# EAGLE board USB Multiplicator 2025 (EAGLE 9.6.2)
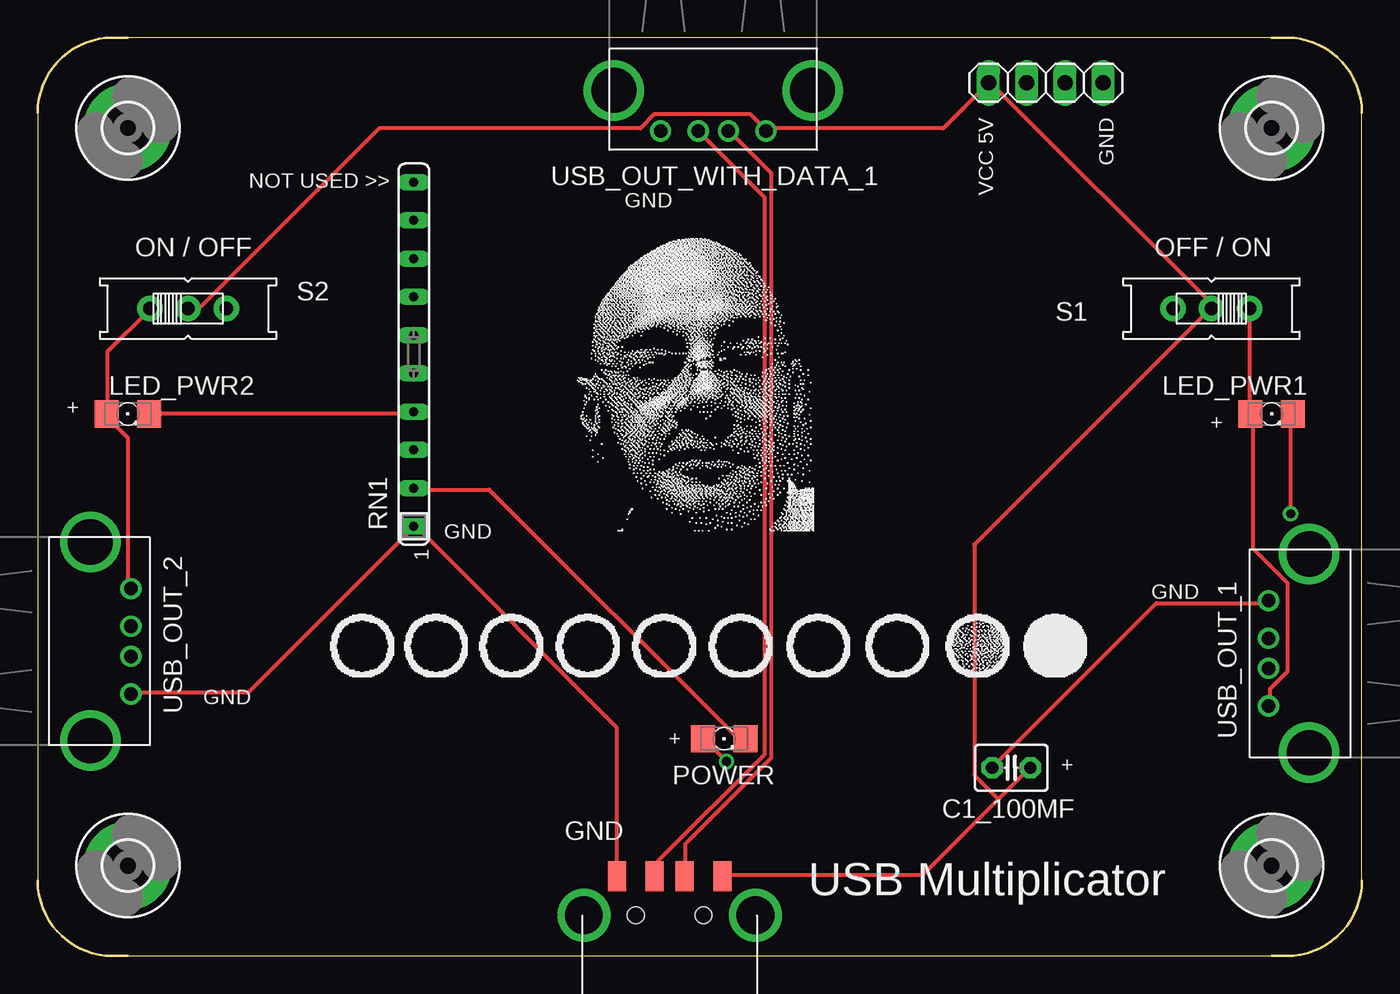
[diagram p0: board, top side]
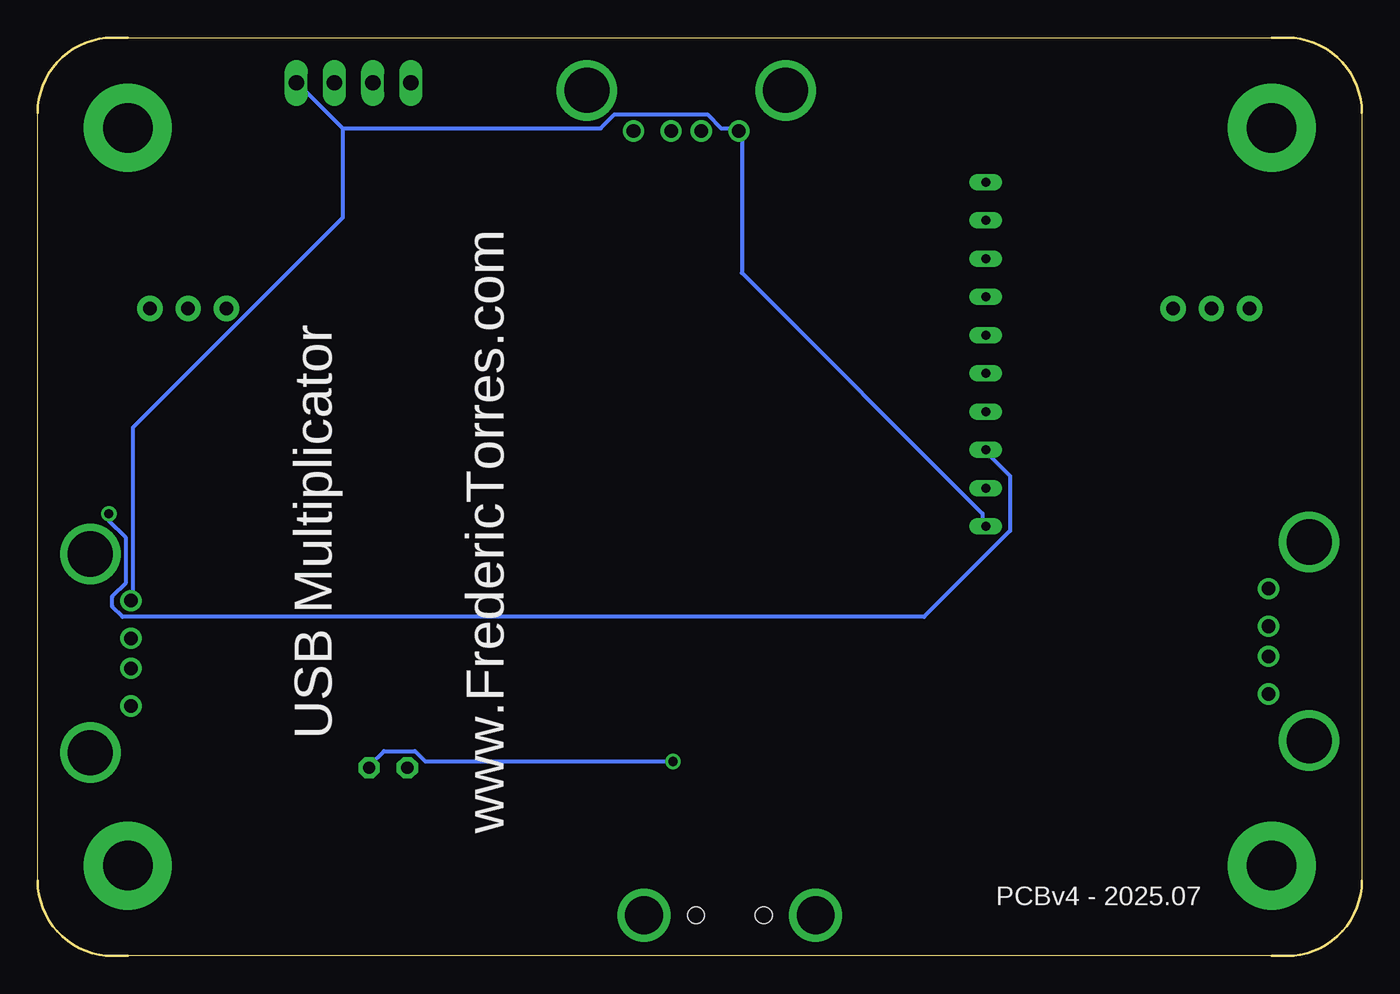
[diagram p1: board, bottom side, seen from below]

Size 88 x 61 mm. Coordinates in mm from the lower left corner, seen from the top.
Outline: 6,0 82,0 83,0 arc90 88,5 88,56 arc90 83,61 82,61 6,61 5,61 arc90 0,56 0,5 arc90 5,0 6,0
Copper layers (1*16): Top 0.035mm / dielectric 1.5mm / Bottom 0.035mm
Design rules "default": minimum track width 10mil, minimum drill 24mil, track to track 8mil, track to pad 8mil, pad to pad 8mil, via to via 8mil, smd to smd 8mil, copper to edge 40mil, drill to drill 8mil, minimum pad ring 10mil, minimum via ring 8mil, stop-mask expansion 4mil, vias tented up to drill 0mil, thermal gap 10mil

## Footprints (pad centres in the part's own frame; a part is rotated, then mirrored left to right if it is on the bottom)
C025-030X050 = drill 0.813 pad 1.422 octagon: 1 -1.27,0; 2 1.27,0
3,3-PAD = drill 3.3 pad 5.842: B3,3 0,0
1X04 = drill 1.016 long: 1 -3.81,0; 2 -1.27,0; 3 1.27,0; 4 3.81,0
1206 = smd 1.6 x 1.803: A -1.422,0; C 1.422,0
SIP10 = drill 0.6 long: 1 -11.46,0; 2 -8.92,0; 3 -6.38,0; 4 -3.84,0; 5 -1.3,0; 6 1.24,0; 7 3.78,0; 8 6.32,0; 9 8.86,0; 10 11.4,0
EG1218 = drill 0.9 pad 1.676: O -2.54,0; P 0,0; S 2.54,0
USB-FEMALE-A-PTH = drill 0.9: D+ 5.9,1.3; D- 7.9,1.3; GND 3.4,1.3; VBUS 10.4,1.3 | drill 3: GND@1 13.5,4; GND@2 0.3,4
MOLEX_480371000 = smd 1.2 x 2: 1 3.5,2.6; 2 1,2.6; 3 -1,2.6; 4 -3.5,2.6 | drill 2.5: M1 -5.7,0; M2 5.7,0 | hole 1.1: -2.25,0; 2.25,0

## Placement (x,y rotation side)
C1_100MF  [C025-030X050]  64.7,12.5 0 top
H1  MOUNT-PAD-ROUND3.3  [3,3-PAD]  6,55 0 top
H2  MOUNT-PAD-ROUND3.3  [3,3-PAD]  6,6 0 top
H3  MOUNT-PAD-ROUND3.3  [3,3-PAD]  82,55 0 top
H4  MOUNT-PAD-ROUND3.3  [3,3-PAD]  82,6 0 top
JP1  [1X04]  67,58 0 top
LED_PWR  [1206]  45.63,14.44 0 top
LED_PWR1  [1206]  82,36 0 top
LED_PWR2  [1206]  6,36 0 top
RN1  [SIP10]  25,40 90 top
S1  [EG1218]  78,43 180 top
S2  [EG1218]  10,43 0 top
USB_OUT_1  USB  [USB-FEMALE-A-PTH]  80.5,27 270 top
USB_OUT_2  USB  [USB-FEMALE-A-PTH]  7.5,14 90 top
USB_OUT_WITH_DATA_1  USB  [USB-FEMALE-A-PTH]  38,53.5 0 top
X1  USB-A  [MOLEX_480371000]  42,2.7 0 top

## Library data of the parts
C1_100MF LED_PWR LED_PWR1 LED_PWR2 S1 S2 X1 = adafruit
H1-H4 = holes
JP1 = pinhead
RN1 = resistor-sip
USB_OUT_1 USB_OUT_2 USB_OUT_WITH_DATA_1 = STUNTAZ

## Nets
GND: C1_100MF.1 JP1.4 RN1.1 USB_OUT_1.GND USB_OUT_2.GND USB_OUT_WITH_DATA_1.GND X1.4
N$1: USB_OUT_WITH_DATA_1.D- X1.2
N$2: USB_OUT_WITH_DATA_1.D+ X1.3
R1: LED_PWR.C RN1.2
R2: LED_PWR1.C RN1.3
R3: LED_PWR2.C RN1.4
R4: RN1.5
R5: RN1.6
R6: RN1.7
R7: RN1.8
R8: RN1.9
VCC: C1_100MF.2 JP1.1 LED_PWR.A S1.P S2.P USB_OUT_WITH_DATA_1.VBUS X1.1
VCC_USB_2: LED_PWR2.A S2.O USB_OUT_2.VBUS
VCC_USB_3: LED_PWR1.A S1.O USB_OUT_1.VBUS

## Tracks (layer width: path | path; a pad name or v marks a point on that pad's centre or on a via)
GND
  Top 0.254: X1.4 38.46,5.37 38.46,15.2 25.2,28.46 RN1.1 24.98,28.46 14,17.49 6.23,17.49 USB_OUT_2.GND | USB_OUT_1.GND 81.67,23.43 74.35,23.43 63.61,12.69 C1_100MF.1
  Bottom 0.254: 67.72,54.98 50.58,54.98 49.66,55.89 43.49,55.89 42.58,54.98 41.43,54.98 USB_OUT_WITH_DATA_1.GND 41.2,54.75 41.2,45.38 25.2,29.38 25.2,28.69 RN1.1 | 67.72,54.98 70.69,57.95 JP1.4 | 67.72,54.98 67.72,49.04 81.67,35.09 81.67,23.66 USB_OUT_1.GND
N$1
  Top 0.254: X1.2 43.03,5.37 43.03,7.43 48.75,13.15 48.75,52.01 46.01,54.75 USB_OUT_WITH_DATA_1.D-
N$2
  Top 0.254: X1.3 41.2,5.37 41.2,6.29 48.29,13.38 48.29,50.41 43.95,54.75 USB_OUT_WITH_DATA_1.D+
R1
  Top 0.254: LED_PWR.C 46.92,14.52 46.46,14.52 30,30.98 25.2,30.98 RN1.2
R2  (via drill 0.61)
  Top 0.254: v83.27,29.38 83.27,35.78 LED_PWR1.C
  Bottom 0.254: v83.27,29.38 83.27,28.92 82.12,27.78 82.12,24.8 83.04,23.89 83.04,23.2 82.35,22.52 29.09,22.52 23.38,28.23 23.38,31.89 24.98,33.49 RN1.3
R3
  Top 0.254: LED_PWR2.C 7.6,36.01 24.98,36.01 RN1.4
VCC  (via drill 0.61)
  Top 0.254: v45.78,12.92 44.41,14.29 LED_PWR.A | 63.84,10.4 65.89,12.46 C1_100MF.2 | 63.84,10.4 58.81,5.37 45.55,5.37 X1.1 | S2.P 10.12,43.09 10.8,43.09 22.69,54.98 40.06,54.98 40.98,55.89 47.38,55.89 48.29,54.98 USB_OUT_WITH_DATA_1.VBUS 48.52,54.98 60.18,54.98 63.15,57.95 JP1.1 63.38,57.95 77.78,43.55 77.78,43.09 S1.P 77.78,42.86 62.24,27.32 62.24,12 63.84,10.4
  Bottom 0.254: v45.78,12.92 62.24,12.92 62.92,13.6 64.98,13.6 65.89,12.69 C1_100MF.2
VCC_USB_2
  Top 0.254: S2.O 7.37,42.86 4.63,40.12 4.63,36.01 LED_PWR2.A 4.63,35.78 6,34.41 6,24.58 USB_OUT_2.VBUS
VCC_USB_3
  Top 0.254: S1.O 80.53,42.86 80.53,36.01 LED_PWR1.A 80.75,35.78 80.75,27.09 83.04,24.8 83.04,18.86 81.9,17.72 81.9,16.8 USB_OUT_1.VBUS

## Text on the board
tNames: VCC 5V | GND | NOT USED >> | GND | ON / OFF | OFF / ON | + | + | GND | GND | GND | + | POWER | + | GND | USB Multiplicator
bNames: USB Multiplicator / / / www.FredericTorres.com | PCBv4 - 2025.07